# Altium PCB pcb.PcbDoc
Units mm, origin at the board's own origin, x right, y up, seen from the top; angles counter-clockwise.
Board outline 37.5 x 37.5 mm, 2 copper layers (Top Layer, Bottom Layer); 10 components, 6 nets, 22 pads, 0 vias.
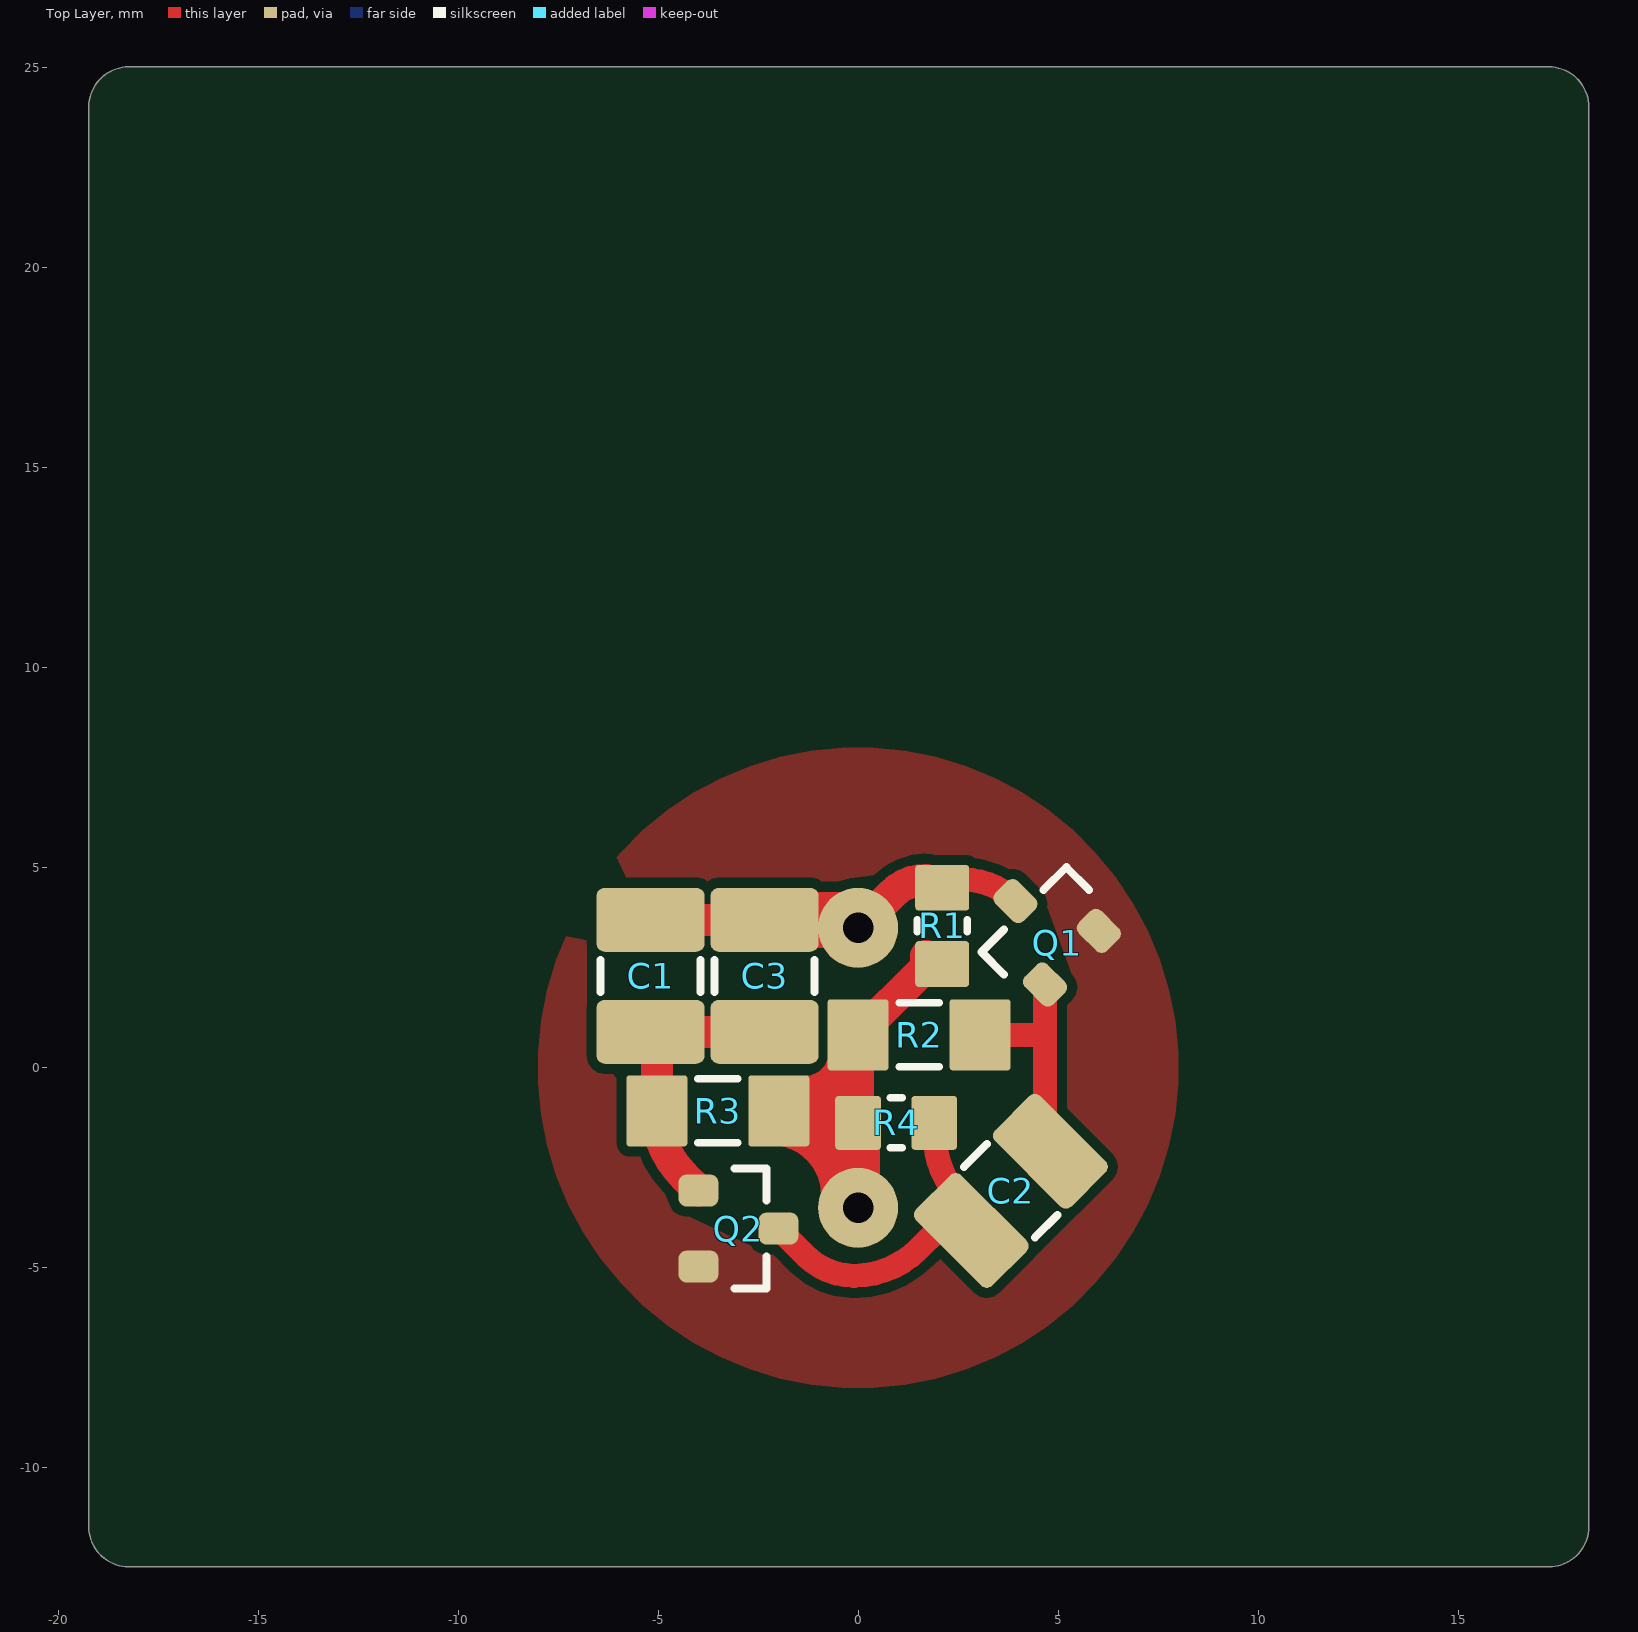
[diagram p0: Top Layer view]
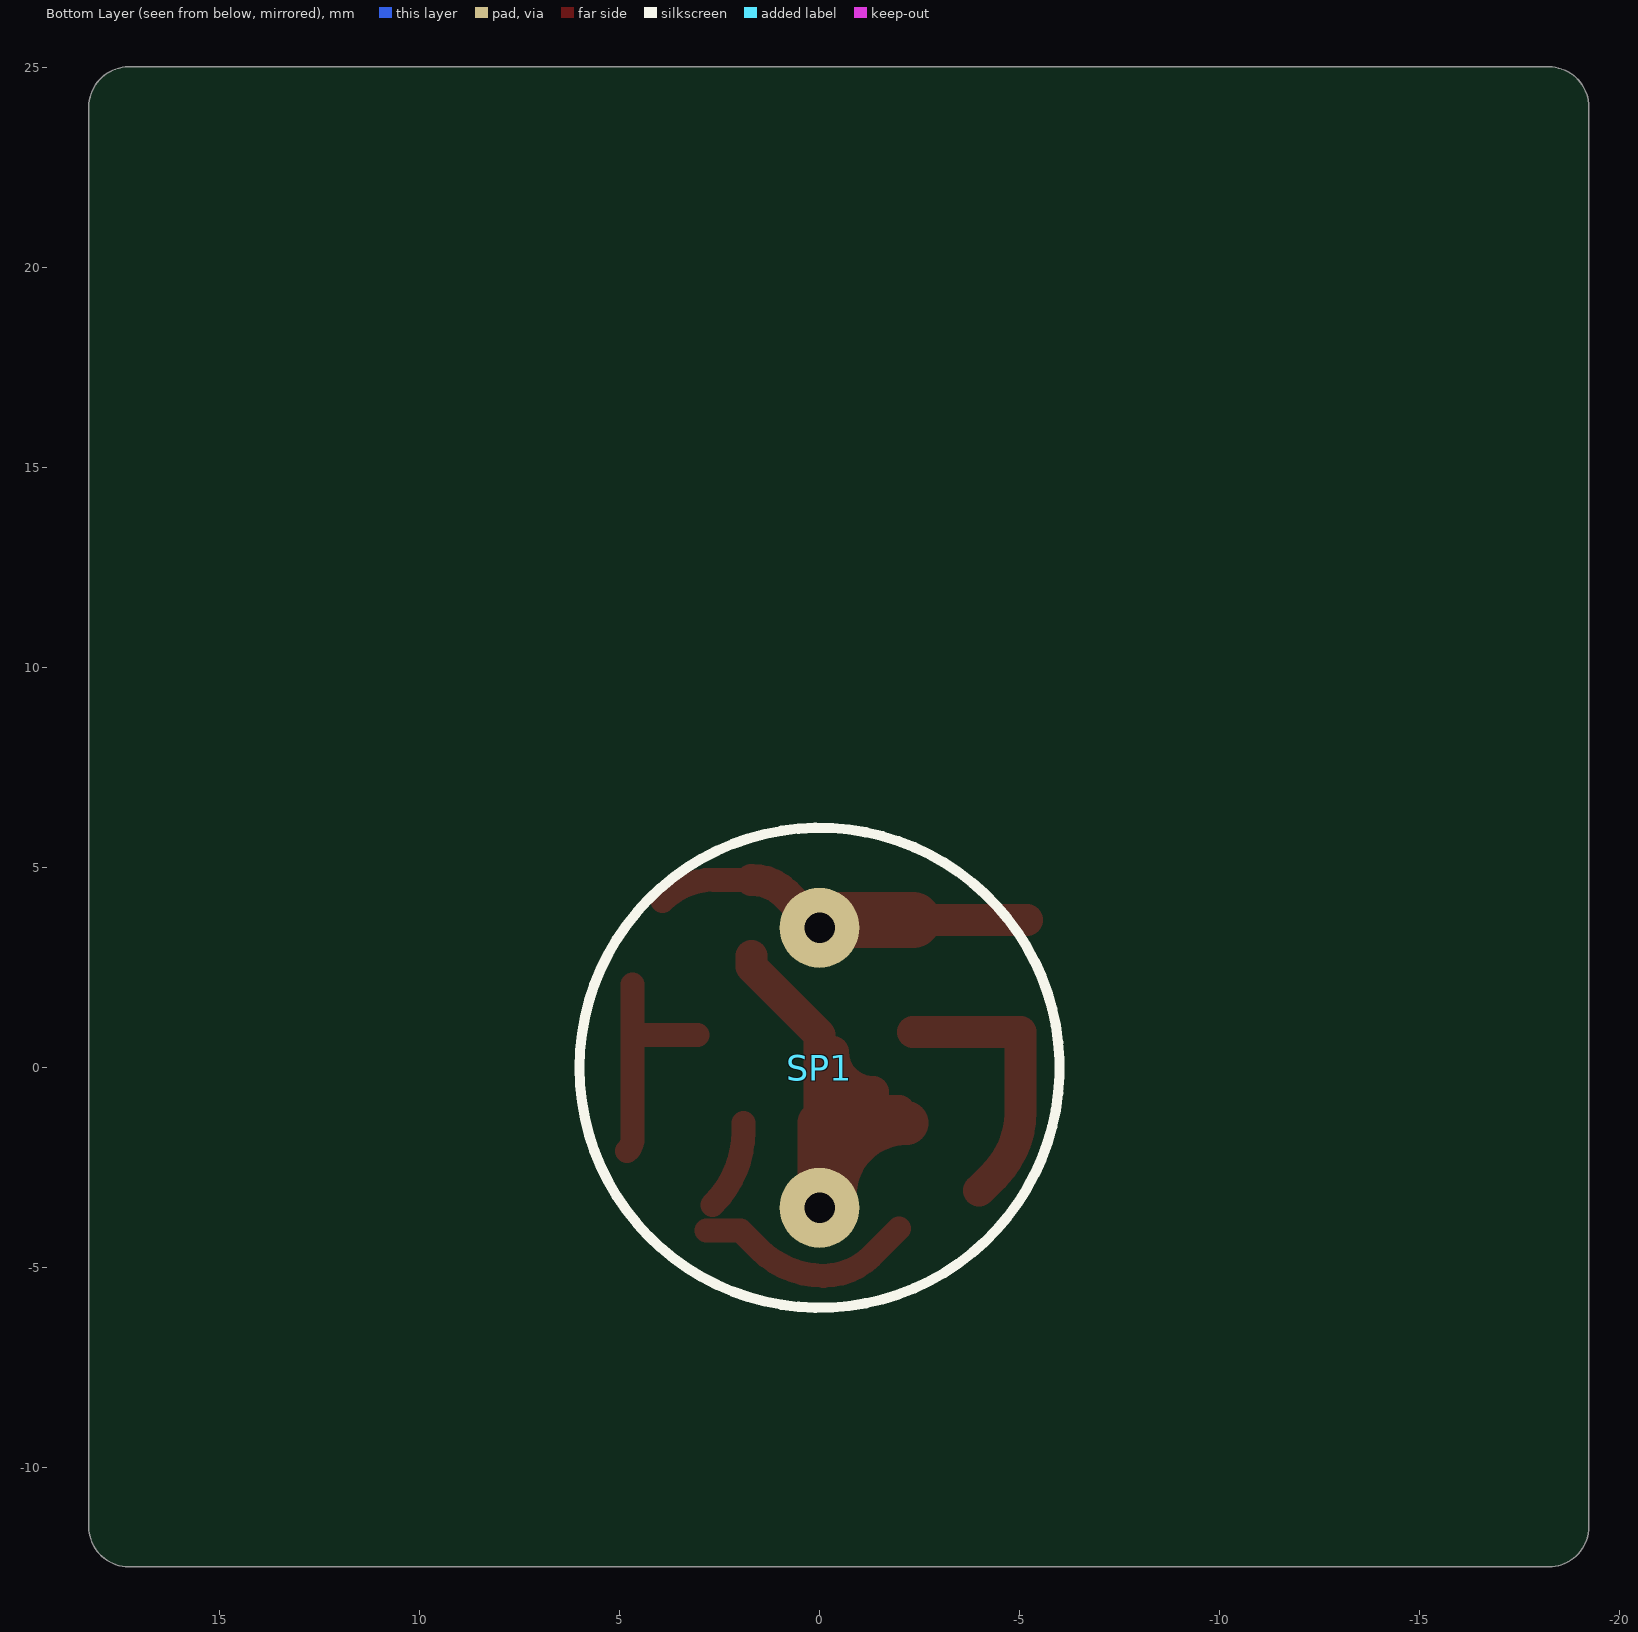
[diagram p1: Bottom Layer view, seen from below]
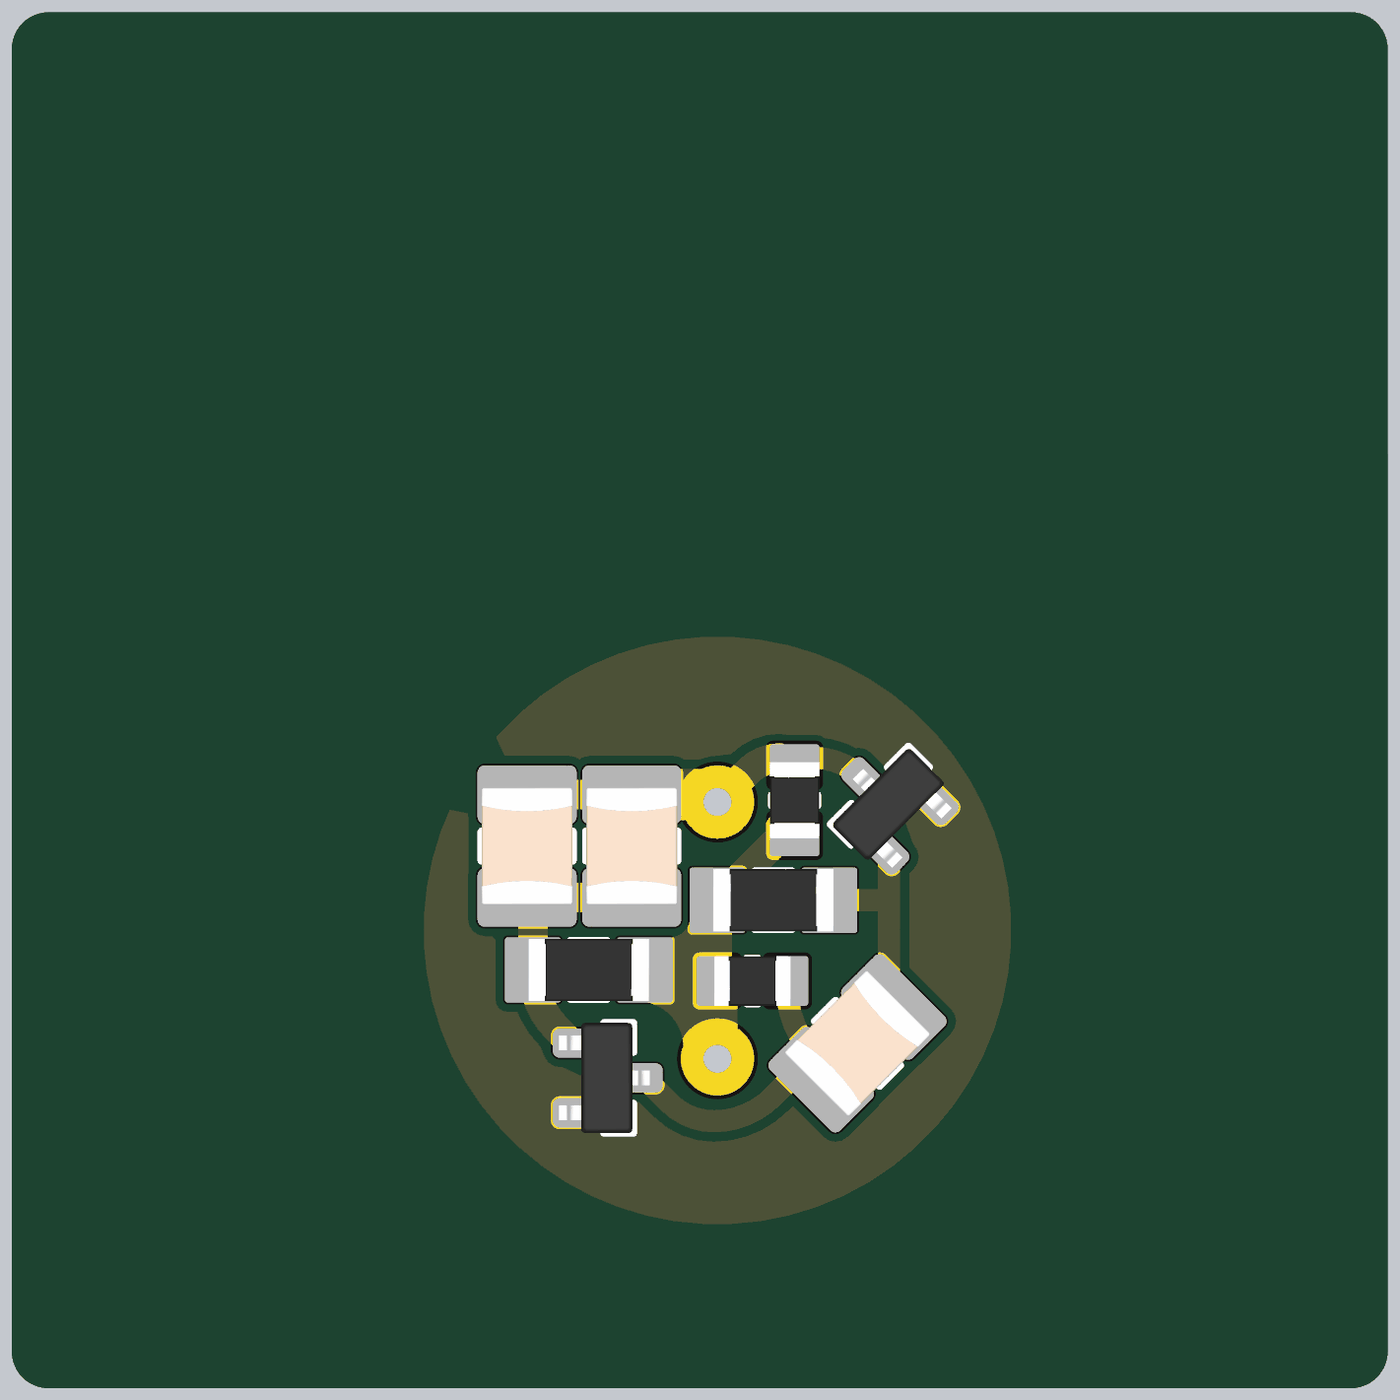
[diagram p2: 3D render of the assembled board from above, using the file's embedded part models]

## Layer stack, top to bottom
Top Solder: solder mask 0.0102, Solder Resist, Dk 3.5
Top Layer: signal copper 0.0356
Dielectric 1: dielectric 0.32, FR-4, Dk 4.8
Bottom Layer: signal copper 0.0356
Bottom Solder: solder mask 0.0102, Solder Resist, Dk 3.5

## Board outline
-19.232,-11.476 ccw(c-18.232,-11.476) -18.232,-12.476 -18.232,-12.477 17.267,-12.476 ccw(c17.267,-11.476) 18.267,-11.476 18.267,24.023 ccw(c17.267,24.023) 17.267,25.023 -18.232,25.023 ccw(c-18.232,24.023) -19.232,24.023

## Design rules (kind name [scope] priority, off if disabled: settings)
Clearance [All] p1: gap=0.15 ignorepadtopadclearanceinfootprint=FALSE except(0.25: Arc-Fill Arc-Poly Arc-Region Track-Fill Track-Poly Track-Region SMDPad-Fill SMDPad-Poly SMDPad-Region THPad-Fill THPad-Poly THPad-Region Via-Fill Via-Poly Via-Region Fill-Fill Fill-Poly Fill-Region Poly-Poly Poly-Region Region-Region)
MinimumSolderMaskSliver [All] p1 off: minsoldermaskwidth=0.254
PolygonConnect [All] p1: connectstyle=Direct reliefconductorwidth=0.254 reliefentries=4 polygonreliefangle="90 Angle" airgapwidth=0.254
RoutingVias [All] p1 off: holewidth=0.711 width=1.27 viastyle="Through Hole" minholewidth=0.711 minwidth=1.27 maxholewidth=0.711 maxwidth=1.27
SilkToSolderMaskClearance [IsPad] p1 off: minsilkscreentomaskgap=0.254 clearancetoexposedcopper=TRUE
SolderMaskExpansion [All] p1: expansion=0.102 istentingtop=FALSE
SupplyNets "Schematic Supply Nets_1" [InNet('GND')] p1: voltage=0.000
SupplyNets "Schematic Supply Nets" [InNet('12V')] p2: voltage=0.000
Width [All] p1: maxlimit=12.7 minlimit=0.051 preferedwidth=0.254
28 further rules are at their usual default settings.

## Components (designator, comment, footprint, x,y, rotation, side; value= is the part's Value field where it differs from the comment)
C1 "10u" C1210-2.5MM -5.188,2.3 r90 top
C2 "10u" C1210-2.5MM 3.817,-3.077 r45 top
C3 "10u" C1210-2.5MM -2.337,2.3 r90 top
Q1 "BC847" SOT-23 4.639,3.459 r315 top
Q2 "BC847" SOT-23 -2.991,-4.02 r180 top
R1 "22k" R0805 2.103,3.548 r270 top
R2 "180k" R1206 1.524,0.823 r180 top
R3 "180k" R1206 -3.507,-1.077 r0 top
R4 "22k" R0805 0.953,-1.377 r180 top
SP1 "HCM1212A" BUZZER 0,0 r180 bottom

## Footprints (in the part's own frame and the unit in brackets; to place one, negate y for a bottom-side part, rotate by r counter-clockwise, add the part's x,y. Pads: shape width x height; smd on the part's side, far side on the other; paste and mask are expansions set on the pad)
BUZZER [mm]
  round 2 hole 0.762: 1(0,-3.5) 2(0,3.5)
  silkscreen extent -6,-6 6,6
C1210-2.5MM [mm] "Chip Capacitor"
  rrect25% 1.6x2.7 smd mask+0.05: 1(-1.4,0) 2(1.4,0)
  silkscreen extent -0.4,-1.25 0.4,1.25, body extent -1.6,-1.25 1.6,1.25, height 2.52
R0805 [mil] "Chip Resistor; Body 1.6 x 0.8 mm (LxW typ)"
  rrect15% 45x53.15 smd: 1(-37.5,0) 2(37.5,0)
  silkscreen extent -6,-25 6,25, body extent -41,-27 41,27, height 24
R1206 [mil] "Chip Resistor"
  rrect10% 60x70 smd mask+1.97: 1(-60,0) 2(60,0)
  silkscreen extent -20,-31 20,31, body extent -65,-33 65,33, height 26
SOT-23 [mm]
  rrect50% 1x0.8 smd mask+0.05: 1(1,-0.95) 2(1,0.95) 3(-1,0)
  silkscreen extent -0.7,-1.5 0.1,1.5, body extent -1.27,-1.5 1.33,1.5, height 1.1

## Part data
C1 C2 C3: library part Cap
Q1 Q2: library part MMBT2222ALT1G, P/N=MJD122
R1 R2 R3 R4: library part Res1
SP1: library part "Header 2", "HCM1212X / 12V, 2.3Hz, 85dB/10cm, with gen."

## Nets (pads, with @x,y where several pads share a name; then routed paths per layer and width w, separated by ;. In a path a pad name is that pad's centre, name@x,y a point inside that pad or via, vN(x,y) a via of type N, cw(c..) or ccw(c..) an arc to the next point about the centre after c; other vN are vias at no path point)
12V: R1.2 R2.2 R3.2 R4.2 SP1.1 | length 17.3
  Top Layer w0.8: R3.2 R4.2@0,-1.077 ; R3.2@-1.333,-0.602 ccw(c-1.333,0.398) R2.2@-0.333,0.398 ; R3.2@-1.233,-0.877 ccw(c-1.233,0.123) R2.2@-0.233,0.123 ; R4.2 R4.2@0,-1.077 ; R1.2@1.703,2.795 1.703,2.527 R2.2 R4.2@0,-1.077
  Top Layer w1.1: R3.2@-2.177,-1.383 cw(c-2.177,-3.183) SP1.1@-0.377,-3.183 ; R3.2@-1.477,-1.406 cw(c-1.477,-2.883) SP1.1@0,-2.883 ; SP1.1 R4.2
BUZ: C1.2 C3.2 Q1.3 R1.1 SP1.2 | length 9.8
  Top Layer w0.6: R1.1@1.703,4.7 2.642,4.7 cw(c2.642,2.876) Q1.3
  Top Layer w0.8: C1.2 C3.2 ; SP1.2@-0.483,3.7 cw(c-0.483,3.017) SP1.2 0.844,4.344 cw(c1.703,3.485) R1.1@1.703,4.7
  Top Layer w1.4: C3.2 SP1.2@-0.483,3.7
GND: Q1.2 Q2.2
NetC1_1: C1.1 C3.1 Q2.1 R3.1 | length 7
  Top Layer w0.8: Q2.1 -4.357,-2.704 cw(c-2.729,-1.077) R3.1 -5.031,0.9 C3.1
NetC2_1: C2.1 Q2.3 R4.1 | length 7.9
  Top Layer w0.6: Q2.3 -1.313,-4.698 ccw(c-0.1,-3.485) -0.1,-5.2 ccw(c-0.1,-2.92) 1.513,-4.532 1.978,-4.067 C2.1 ; R4.1 1.905,-1.602 ccw(c4.445,-1.602) 2.649,-3.398 C2.1@2.678,-3.427
NetC2_2: C2.2 Q1.1 R2.1 | length 5.8
  Top Layer w0.6: R2.1 4.674,0.823 ; Q1.1 4.674,0.823 ; C2.2 cw(c5.13,-1.764) 4.674,-1.764 4.674,0.823

## Polygon pours and split planes (outlines as drawn)
GND on Top Layer "GND_L01_P000" (solid, remove dead copper, pour order 0): 0,8 ccw(c0,0) -8,0 ccw(c0,0) 0,-8 ccw(c0,0) 8,0 ccw(c0,0)

## Other copper
Top Layer:
  pour cut-out: -1.727,-3.129 -2.402,-4.577 -4.34,-3.673 -3.665,-2.225
  pour cut-out: 3.211,3.524 4.712,4.07 5.444,2.06 3.943,1.514
  pour cut-out: 4.604,-2.024 5.866,-3.287 3.957,-5.196 2.827,-4.067 4.807,-2.087
  pour cut-out: -5,1 -6.785,1 -6.785,3.7 -5.188,3.7 -5.188,0.9